# Altium PCB BAILEY.PcbDoc (part 2 of 8)
Units mil, origin at the board's own origin, x right, y up, seen from the top; angles counter-clockwise.
Board outline 4500 x 4000 mil, 4 copper layers (Signal Layer 1, Signal Layer 2, Signal Layer 3, Signal Layer 4), stack 59.904 mil thick; 190 components, 117 nets, 664 pads, 291 vias.
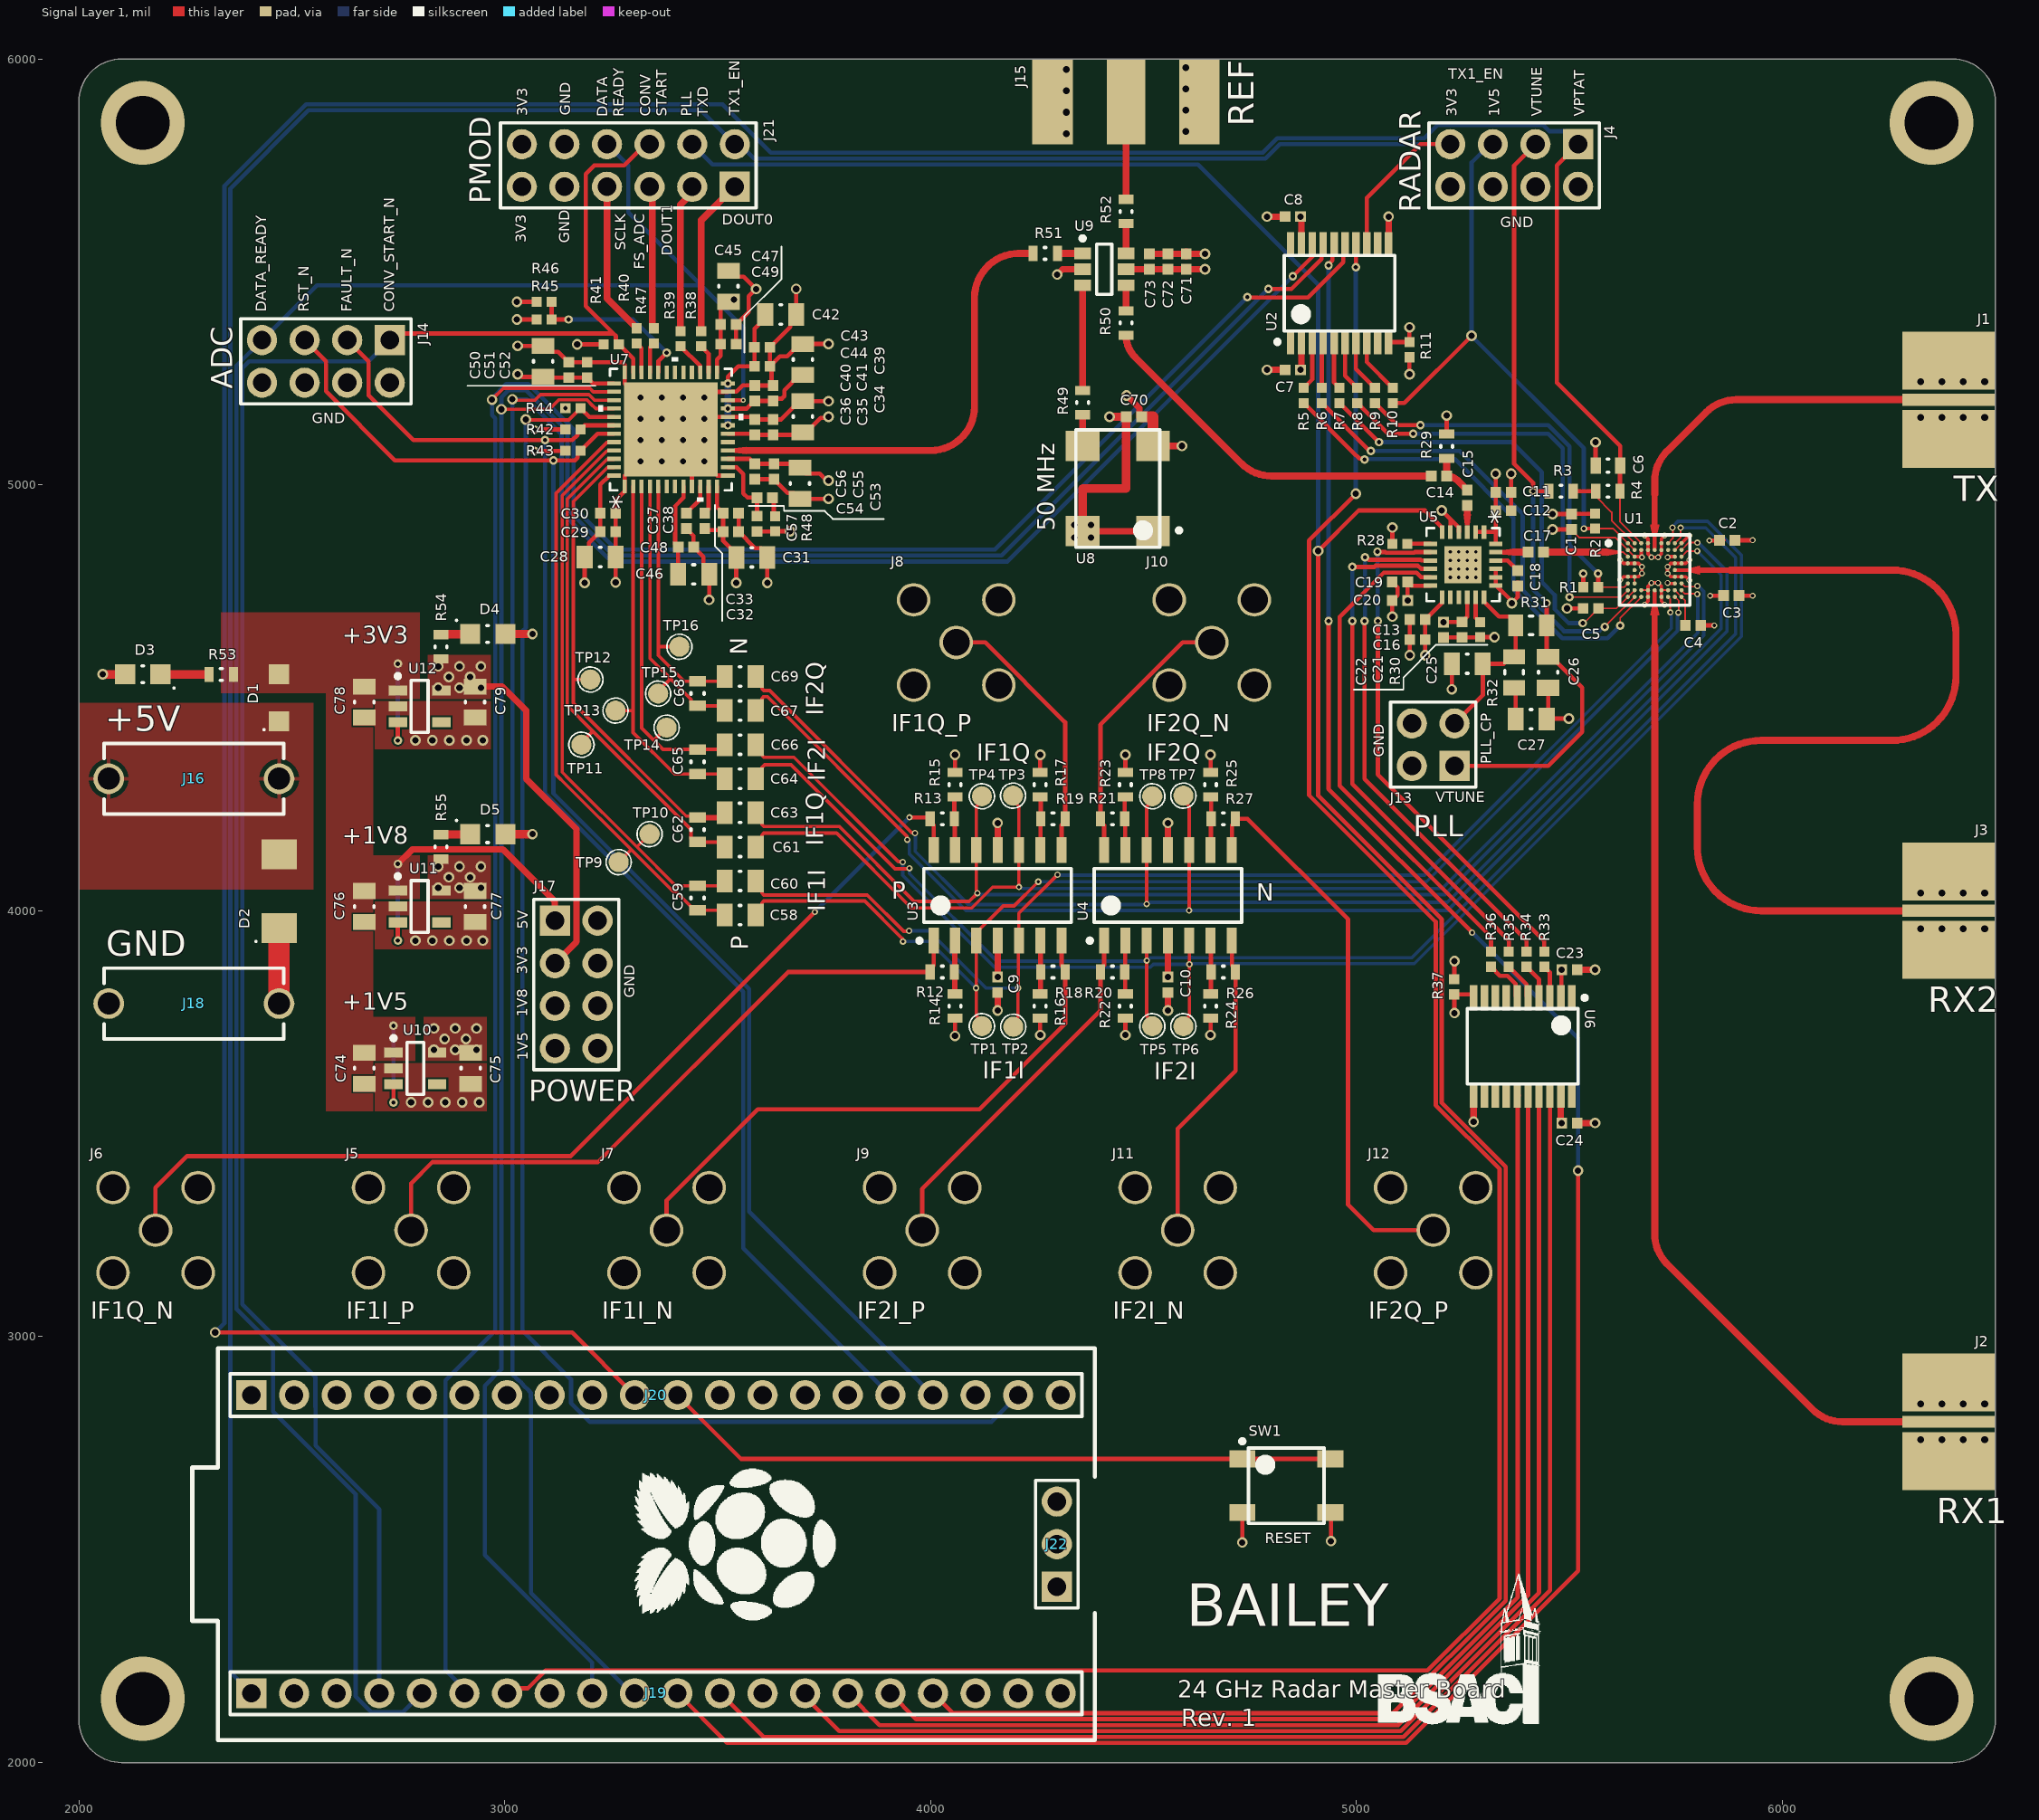
[diagram p0: Signal Layer 1 view]

## Part data (continued)
C17 C72: library part CAP, "Ceramic Capacitor, Ceramic, 50V, 10% +Tol, 10% -Tol, X7R, 15% TC, 0.01uF, Surface Mount, 0402", Case Code (Imperial)=0402, Case Code (Metric)=1005, Dielectric=Ceramic, Manufacturer=Yageo, Manufacturer Part Number=CC0402KPX7R9BB103, Max Operating Temperature=125°C, Min Operating Temperature=-55°C, Supplier Part Number=13-CC0402KPX7R9BB103CT-ND, Temperature Coefficient=30ppm/°C, Tolerance=10%, Voltage Rating="50 V", Voltage Rating (DC)=50V, Case/Package=0402, Category="Ceramic Capacitors", China RoHS=Compliant, ComponentLink1Description=https://datasheet.octopart.com:443/CC0402KPX7R9BB103-Yageo-datasheet-177165144.pdf?src-supplier=IHS, ComponentLink1URL=https://datasheet.octopart.com:443/CC0402KPX7R9BB103-Yageo-datasheet-177165144.pdf?src-supplier=IHS, ComponentLink2Description=https://datasheet.octopart.com:443/CC0402KPX7R9BB103-Yageo-datasheet-78855684.pdf?src-supplier=Upverter, ComponentLink2URL=https://datasheet.octopart.com:443/CC0402KPX7R9BB103-Yageo-datasheet-78855684.pdf?src-supplier=Upverter, ComponentLink3Description=https://datasheet.octopart.com/CC0402KPX7R9BB103-Yageo-datasheet-12526321.pdf, ComponentLink3URL=https://datasheet.octopart.com/CC0402KPX7R9BB103-Yageo-datasheet-12526321.pdf, ComponentLink4Description=https://datasheet.octopart.com/CC0402KPX7R9BB103-Yageo-datasheet-10883670.pdf, ComponentLink4URL=https://datasheet.octopart.com/CC0402KPX7R9BB103-Yageo-datasheet-10883670.pdf, ComponentLink5Description=https://datasheet.octopart.com:443/CC0402KPX7R9BB103-Yageo-datasheet-182965545.pdf?src-supplier=Farnell, ComponentLink5URL=https://datasheet.octopart.com:443/CC0402KPX7R9BB103-Yageo-datasheet-182965545.pdf?src-supplier=Farnell, ComponentLink6Description=https://datasheet.octopart.com:443/CC0402KPX7R9BB103-Yageo-datasheet-151948686.pdf?src-supplier=Farnell, ComponentLink6URL=https://datasheet.octopart.com:443/CC0402KPX7R9BB103-Yageo-datasheet-151948686.pdf?src-supplier=Farnell, ComponentLink7Description=https://datasheet.octopart.com:443/CC0402KPX7R9BB103-Yageo-datasheet-166511530.pdf?src-supplier=Future+Electronics, ComponentLink7URL=https://datasheet.octopart.com:443/CC0402KPX7R9BB103-Yageo-datasheet-166511530.pdf?src-supplier=Future+Electronics, ComponentLink8Description=https://datasheet.octopart.com:443/CC0402KPX7R9BB103-Yageo-datasheet-137700085.pdf?src-supplier=Future+Electronics, ComponentLink8URL=https://datasheet.octopart.com:443/CC0402KPX7R9BB103-Yageo-datasheet-137700085.pdf?src-supplier=Future+Electronics, ComponentLink9Description=https://datasheet.octopart.com:443/CC0402KPX7R9BB103-Yageo-datasheet-27626582.pdf?src-supplier=Future+Electronics, ComponentLink9URL=https://datasheet.octopart.com:443/CC0402KPX7R9BB103-Yageo-datasheet-27626582.pdf?src-supplier=Future+Electronics, ComponentLink10Description=https://datasheet.octopart.com:443/CC0402KPX7R9BB103-Yageo-datasheet-24578986.pdf?src-supplier=Future+Electronics, ComponentLink10URL=https://datasheet.octopart.com:443/CC0402KPX7R9BB103-Yageo-datasheet-24578986.pdf?src-supplier=Future+Electronics, ComponentLink11Description=https://datasheet.octopart.com:443/CC0402KPX7R9BB103-Yageo-datasheet-15895757.pdf?src-supplier=Future+Electronics, ComponentLink11URL=https://datasheet.octopart.com:443/CC0402KPX7R9BB103-Yageo-datasheet-15895757.pdf?src-supplier=Future+Electronics, ComponentLink12Description=http://sigma.octopart.com:80/rohs_statement/Surface-Mount-Ceramic-Multilayer-Capacitors%3B-General-Purpose-%26-High-Capacitance-Class-2%2C-X7R-Yageo-family-124.pdf?src-supplier=Compliance+Statements, ComponentLink12URL=http://sigma.octopart.com:80/rohs_statement/Surface-Mount-Ceramic-Multilayer-Capacitors%3B-General-Purpose-%26-High-Capacitance-Class-2%2C-X7R-Yageo-family-124.pdf?src-supplier=Compliance+Statements, ComponentLink13Description=http://sigma.octopart.com:80/reach_statement/Surface-Mount-Ceramic-Multilayer-Capacitors%3B-General-Purpose-%26-High-Capacitance-Class-2%2C-X7R-Yageo-family-125.pdf?src-supplier=Compliance+Statements, ComponentLink13URL=http://sigma.octopart.com:80/reach_statement/Surface-Mount-Ceramic-Multilayer-Capacitors%3B-General-Purpose-%26-High-Capacitance-Class-2%2C-X7R-Yageo-family-125.pdf?src-supplier=Compliance+Statements, ComponentLink14Description=http://sigma.octopart.com:80/conflict_mineral_statement/Yageo-company-3.pdf?src-supplier=Compliance+Statements, ComponentLink14URL=http://sigma.octopart.com:80/conflict_mineral_statement/Yageo-company-3.pdf?src-supplier=Compliance+Statements, ComponentLink15Description=http://sigma.octopart.com:80/rohs_statement/Yageo-company-2.pdf?src-supplier=Compliance+Statements, ComponentLink15URL=http://sigma.octopart.com:80/rohs_statement/Yageo-company-2.pdf?src-supplier=Compliance+Statements, Composition=Ceramic, Country of Origin="Mainland China, Taiwan", Depth=500µm, Dielectric Material=Ceramic, Export Control Classification Number (ECCN) Code=EAR99, Halogen Free="Halogen Free", Harmonized Tariff Schedule (HTS) Code=8532.24.00.20, Height=500µm, Introduction Date=2004-02-24, Lead Free="Lead Free", Length=1mm, Lifecycle Status=Production, Material=Ceramic, Mounting Technology="Surface Mount", Number of Terminals=2, Package Size=0402, Packaging="Tape and Reel", Pricing="1=0.1, 10=0.018, 50=0.012, 100=0.0101, 500=0.007, 1000=0.00606, 2500=0.00507, 5000=0.00448 (USD)", REACH SVHC=Yes, RoHS=Compliant, Stock=222524, Supplier=DigiKey, Termination=SMD/SMT, Weight=652.039032µg, Width=500µm
C18: library part CAP, "50V 100pF C0G ±5% 0402 Multilayer Ceramic Capacitors MLCC - SMD/SMT ROHS", Case Code (Imperial)=0402, Case Code (Metric)=1005, Dielectric=Ceramic, Manufacturer="Samsung Electro-Mechanics", Manufacturer Part Number=CL05C101JB5NNNC, Max Operating Temperature=125°C, Min Operating Temperature=-55°C, Supplier Part Number=1276-1025-1-ND, Temperature Coefficient=30ppm/°C, Tolerance=5%, Voltage=50V, Voltage Rating="50 V", Case/Package=0402, Category="Ceramic Capacitors", China RoHS=Compliant, ComponentLink1Description=https://datasheet.octopart.com:443/CL05C101JB5NNNC-Samsung-Electro-Mechanics-datasheet-136482243.pdf?src-supplier=Upverter, ComponentLink1URL=https://datasheet.octopart.com:443/CL05C101JB5NNNC-Samsung-Electro-Mechanics-datasheet-136482243.pdf?src-supplier=Upverter, ComponentLink2Description=https://datasheet.octopart.com/CL05C101JB5NNNC-Samsung-Electro-Mechanics-datasheet-8324245.pdf, ComponentLink2URL=https://datasheet.octopart.com/CL05C101JB5NNNC-Samsung-Electro-Mechanics-datasheet-8324245.pdf, ComponentLink3Description=https://datasheet.octopart.com/CL05C101JB5NNNC-Samsung-Electro-Mechanics-datasheet-97040617.pdf, ComponentLink3URL=https://datasheet.octopart.com/CL05C101JB5NNNC-Samsung-Electro-Mechanics-datasheet-97040617.pdf, ComponentLink4Description=https://datasheet.octopart.com/General-Multilayer-Ceramic-Capacitors-Samsung-datasheet-family-111.pdf, ComponentLink4URL=https://datasheet.octopart.com/General-Multilayer-Ceramic-Capacitors-Samsung-datasheet-family-111.pdf, ComponentLink5Description=https://datasheet.octopart.com:443/CL05C101JB5NNNC-Samsung-Electro-Mechanics-datasheet-141346959.pdf?src-supplier=Samsung+SCT, ComponentLink5URL=https://datasheet.octopart.com:443/CL05C101JB5NNNC-Samsung-Electro-Mechanics-datasheet-141346959.pdf?src-supplier=Samsung+SCT, ComponentLink6Description=https://datasheet.octopart.com:443/CL05C101JB5NNNC-Samsung-Electro-Mechanics-datasheet-110326792.pdf?src-supplier=Future+Electronics, ComponentLink6URL=https://datasheet.octopart.com:443/CL05C101JB5NNNC-Samsung-Electro-Mechanics-datasheet-110326792.pdf?src-supplier=Future+Electronics, ComponentLink7Description=https://datasheet.octopart.com:443/CL05C101JB5NNNC-Samsung-Electro-Mechanics-datasheet-81461704.pdf?src-supplier=Future+Electronics, ComponentLink7URL=https://datasheet.octopart.com:443/CL05C101JB5NNNC-Samsung-Electro-Mechanics-datasheet-81461704.pdf?src-supplier=Future+Electronics, ComponentLink8Description=https://datasheet.octopart.com:443/CL05C101JB5NNNC-Samsung-datasheet-26589069.pdf?src-supplier=Future+Electronics, ComponentLink8URL=https://datasheet.octopart.com:443/CL05C101JB5NNNC-Samsung-datasheet-26589069.pdf?src-supplier=Future+Electronics, ComponentLink9Description=https://datasheet.octopart.com:443/CL05C101JB5NNNC-Samsung-Electro-Mechanics-datasheet-149136758.pdf?src-supplier=Future+Electronics, ComponentLink9URL=https://datasheet.octopart.com:443/CL05C101JB5NNNC-Samsung-Electro-Mechanics-datasheet-149136758.pdf?src-supplier=Future+Electronics, ComponentLink10Description=https://datasheet.octopart.com:443/CL05C101JB5NNNC-Samsung-datasheet-37081328.pdf?src-supplier=Future+Electronics, ComponentLink10URL=https://datasheet.octopart.com:443/CL05C101JB5NNNC-Samsung-datasheet-37081328.pdf?src-supplier=Future+Electronics, ComponentLink11Description=https://datasheet.octopart.com:443/CL05C101JB5NNNC-Samsung-datasheet-8326407.pdf?src-supplier=TME, ComponentLink11URL=https://datasheet.octopart.com:443/CL05C101JB5NNNC-Samsung-datasheet-8326407.pdf?src-supplier=TME, ComponentLink12Description=http://sigma.octopart.com:80/rohs_certificate/General-Multilayer-Ceramic-Capacitors-Samsung-family-110.pdf?src-supplier=Compliance+Statements, ComponentLink12URL=http://sigma.octopart.com:80/rohs_certificate/General-Multilayer-Ceramic-Capacitors-Samsung-family-110.pdf?src-supplier=Compliance+Statements, ComponentLink13Description=http://sigma.octopart.com:80/rohs_statement/General-Multilayer-Ceramic-Capacitors-Samsung-family-132.pdf?src-supplier=Compliance+Statements, ComponentLink13URL=http://sigma.octopart.com:80/rohs_statement/General-Multilayer-Ceramic-Capacitors-Samsung-family-132.pdf?src-supplier=Compliance+Statements, ComponentLink14Description=http://sigma.octopart.com:80/reach_statement/General-Multilayer-Ceramic-Capacitors-Samsung-family-133.pdf?src-supplier=Compliance+Statements, ComponentLink14URL=http://sigma.octopart.com:80/reach_statement/General-Multilayer-Ceramic-Capacitors-Samsung-family-133.pdf?src-supplier=Compliance+Statements, Contact Plating=Tin, Country of Origin="Mainland China, Philippines, South Korea", Depth=500µm, Dielectric Material=Ceramic, Export Control Classification Number (ECCN) Code=EAR99, Harmonized Tariff Schedule (HTS) Code=8532.24.00.20, Height=550µm, Introduction Date=2007-11-14, Length=1mm, Lifecycle Status=Production, Material=Ceramic, Mounting Technology="Surface Mount", Number of Terminals=2, Package Size=0402, Pricing="1=0.08, 10=0.003 (USD)", Radiation Hardening=No, REACH SVHC=Yes, RoHS=Compliant, Schedule B="8532240020, 8532240020|8532240020, 8532240020|8532240020|8532240020, 8532240020|8532240020|8532240020|8532240020", Stock=2037674, Supplier=DigiKey, Thickness=558.8µm, Voltage Rating (DC)=50V, Width=500µm
C25: library part CAP, "0805 750 pF 50 V ±5% Tolerance C0G SMT Multilayer Ceramic Capacitor", Case Code (Imperial)=0805, Case Code (Metric)=2012, Dielectric=Ceramic, Manufacturer="Murata Electronics", Manufacturer Lifecycle Status=NRND, Manufacturer Part Number=GRM2165C1H751JA01D, Max Operating Temperature=125°C, Min Operating Temperature=-55°C, Supplier Part Number=490-1620-1-ND, Tolerance=5%, Voltage Rating="50 V", Voltage Rating (DC)=50V, Case/Package=0805, Category="Ceramic Capacitors", ComponentLink1Description=https://datasheet.octopart.com:443/GRM2165C1H751JA01D-Murata-datasheet-141276297.pdf?src-supplier=Future+Electronics, ComponentLink1URL=https://datasheet.octopart.com:443/GRM2165C1H751JA01D-Murata-datasheet-141276297.pdf?src-supplier=Future+Electronics, ComponentLink2Description=https://datasheet.octopart.com:443/GRM2165C1H751JA01D-Murata-datasheet-22122223.pdf?src-supplier=Future+Electronics, ComponentLink2URL=https://datasheet.octopart.com:443/GRM2165C1H751JA01D-Murata-datasheet-22122223.pdf?src-supplier=Future+Electronics, ComponentLink3Description=https://datasheet.octopart.com/GRM2165C1H751JA01D-Murata-datasheet-8819587.pdf, ComponentLink3URL=https://datasheet.octopart.com/GRM2165C1H751JA01D-Murata-datasheet-8819587.pdf, ComponentLink4Description=https://datasheet.octopart.com/GRM2165C1H751JA01D-Murata-datasheet-12515295.pdf, ComponentLink4URL=https://datasheet.octopart.com/GRM2165C1H751JA01D-Murata-datasheet-12515295.pdf, ComponentLink5Description=https://datasheet.octopart.com/GRM2165C1H751JA01D-Murata-datasheet-12510076.pdf, ComponentLink5URL=https://datasheet.octopart.com/GRM2165C1H751JA01D-Murata-datasheet-12510076.pdf, ComponentLink6Description=https://datasheet.octopart.com/GRM2165C1H751JA01D-Murata-datasheet-11978611.pdf, ComponentLink6URL=https://datasheet.octopart.com/GRM2165C1H751JA01D-Murata-datasheet-11978611.pdf, ComponentLink7Description=https://datasheet.octopart.com/GRM2165C1H751JA01D-Murata-datasheet-10025737.pdf, ComponentLink7URL=https://datasheet.octopart.com/GRM2165C1H751JA01D-Murata-datasheet-10025737.pdf, ComponentLink8Description=https://datasheet.octopart.com/GRM2165C1H751JA01D-Murata-datasheet-14401321.pdf, ComponentLink8URL=https://datasheet.octopart.com/GRM2165C1H751JA01D-Murata-datasheet-14401321.pdf, ComponentLink9Description=https://datasheet.octopart.com:443/GRM2165C1H751JA01D-Murata-datasheet-140706047.pdf?src-supplier=Ciiva, ComponentLink9URL=https://datasheet.octopart.com:443/GRM2165C1H751JA01D-Murata-datasheet-140706047.pdf?src-supplier=Ciiva, ComponentLink10Description=https://datasheet.octopart.com:443/GRM2165C1H751JA01D-Murata-datasheet-138743557.pdf?src-supplier=Ciiva, ComponentLink10URL=https://datasheet.octopart.com:443/GRM2165C1H751JA01D-Murata-datasheet-138743557.pdf?src-supplier=Ciiva, ComponentLink11Description=https://datasheet.octopart.com:443/GRM2165C1H751JA01D-Murata-datasheet-102.pdf?src-supplier=DigiKey, ComponentLink11URL=https://datasheet.octopart.com:443/GRM2165C1H751JA01D-Murata-datasheet-102.pdf?src-supplier=DigiKey, ComponentLink12Description=http://sigma.octopart.com:80/reach_statement/Murata-company-16.pdf?src-supplier=Compliance+Statements, ComponentLink12URL=http://sigma.octopart.com:80/reach_statement/Murata-company-16.pdf?src-supplier=Compliance+Statements, Depth=1.25mm, Dielectric Material=Ceramic, Export Control Classification Number (ECCN) Code=EAR99, Harmonized Tariff Schedule (HTS) Code=8532.24.00.20, Height=600µm, Introduction Date=2013-11-20, Lead Free="Lead Free", Length=2mm, Lifecycle Status=NRND, Material=Ceramic, Mounting Technology="Surface Mount", Number of Terminals=2, Package Size=0805, Pricing="1=0.19, 10=0.107, 50=0.0762, 100=0.0667, 500=0.05076, 1000=0.04585 (USD)", REACH SVHC=Yes, RoHS=Compliant, Schedule B="8532240020, 8532240020|8532240020|8532240020|8532240020|8532240020", Stock=12864, Supplier=DigiKey, Termination=SMD/SMT, Thickness=600µm, Width=1.25mm
C26: library part CAP, "Capacitor SMD Generic", Package Size=0805
C27: library part CAP, "Ceramic Capacitor, Multilayer, Ceramic, 100V, 5% +Tol, 5% -Tol, C0G, 0.015uF, Surface Mount, 2012M/0805", Case/Package=0805, Dielectric=Ceramic, Manufacturer="Murata Electronics", Manufacturer Lifecycle Status="IN PRODUCTION", Manufacturer Part Number=GRM2165C2A153JA01D, Max Operating Temperature=125°C, Min Operating Temperature=-55°C, Supplier Part Number=490-GRM2165C2A153JA01DCT-ND, Temperature Coefficient=30ppm/°C, Tolerance=5%, Voltage Rating="100 V", Voltage Rating (DC)=100V, Category="Ceramic Capacitors", ComponentLink1Description=https://datasheet.octopart.com:443/GRM2165C2A153JA01D-Murata-datasheet-141276372.pdf?src-supplier=Geoflip, ComponentLink1URL=https://datasheet.octopart.com:443/GRM2165C2A153JA01D-Murata-datasheet-141276372.pdf?src-supplier=Geoflip, ComponentLink2Description=https://datasheet.octopart.com:443/GRM2165C2A153JA01D-Murata-datasheet-165579666.pdf?src-supplier=TME, ComponentLink2URL=https://datasheet.octopart.com:443/GRM2165C2A153JA01D-Murata-datasheet-165579666.pdf?src-supplier=TME, ComponentLink3Description=https://datasheet.octopart.com:443/GRM2165C2A153JA01D-Murata-datasheet-140706081.pdf?src-supplier=Ciiva, ComponentLink3URL=https://datasheet.octopart.com:443/GRM2165C2A153JA01D-Murata-datasheet-140706081.pdf?src-supplier=Ciiva, ComponentLink4Description=https://datasheet.octopart.com:443/GRM2165C2A153JA01D-Murata-datasheet-138743583.pdf?src-supplier=Ciiva, ComponentLink4URL=https://datasheet.octopart.com:443/GRM2165C2A153JA01D-Murata-datasheet-138743583.pdf?src-supplier=Ciiva, ComponentLink5Description=https://datasheet.octopart.com/GRM2165C2A153JA01D-Murata-datasheet-12515295.pdf, ComponentLink5URL=https://datasheet.octopart.com/GRM2165C2A153JA01D-Murata-datasheet-12515295.pdf, ComponentLink6Description=https://datasheet.octopart.com/GRM2165C2A153JA01D-Murata-datasheet-12510076.pdf, ComponentLink6URL=https://datasheet.octopart.com/GRM2165C2A153JA01D-Murata-datasheet-12510076.pdf, ComponentLink7Description=https://datasheet.octopart.com/GRM2165C2A153JA01D-Murata-datasheet-11978611.pdf, ComponentLink7URL=https://datasheet.octopart.com/GRM2165C2A153JA01D-Murata-datasheet-11978611.pdf, ComponentLink8Description=https://datasheet.octopart.com/GRM2165C2A153JA01D-Murata-datasheet-10025737.pdf, ComponentLink8URL=https://datasheet.octopart.com/GRM2165C2A153JA01D-Murata-datasheet-10025737.pdf, ComponentLink9Description=https://datasheet.octopart.com/GRM2165C2A153JA01D-Murata-datasheet-8819587.pdf, ComponentLink9URL=https://datasheet.octopart.com/GRM2165C2A153JA01D-Murata-datasheet-8819587.pdf, ComponentLink10Description=http://sigma.octopart.com:80/reach_statement/Murata-company-16.pdf?src-supplier=Compliance+Statements, ComponentLink10URL=http://sigma.octopart.com:80/reach_statement/Murata-company-16.pdf?src-supplier=Compliance+Statements, Dielectric Material=Ceramic, Export Control Classification Number (ECCN) Code=EAR99, Harmonized Tariff Schedule (HTS) Code=8532.24.00.20, Height=600µm, Introduction Date=2020-01-27, Length=2mm, Lifecycle Status=Production, Material=Ceramic, Mounting Technology="Surface Mount", Number of Terminals=2, Package Size=0805, Pricing="1=0.15, 10=0.085, 50=0.06, 100=0.0523, 500=0.03932, 1000=0.03531 (USD)", REACH SVHC=Yes, RoHS=Compliant, Stock=4583, Supplier=DigiKey, Thickness=600µm, Width=1.25mm
C28 C31 C34 C39 C42 C45 C46 C50 C53 C58 C60 C61 C63 C64 C66 C67 C69: library part CAP, "16V 10uF X7R ±10% 0805 Multilayer Ceramic Capacitors MLCC - SMD/SMT ROHS", Case Code (Imperial)=0805, Case Code (Metric)=2012, Dielectric=Ceramic, Manufacturer="Samsung Electro-Mechanics", Manufacturer Part Number=CL21B106KOQNNNE, Max Operating Temperature=125°C, Min Operating Temperature=-55°C, Supplier Part Number=1276-2872-1-ND, Tolerance=10%, Voltage=16V, Voltage Rating="16 V", Case/Package=0805, Category="Ceramic Capacitors", China RoHS=Compliant, ComponentLink1Description=https://datasheet.octopart.com:443/CL21B106KOQNNNE-Samsung-Electro-Mechanics-datasheet-136482503.pdf?src-supplier=IHS, ComponentLink1URL=https://datasheet.octopart.com:443/CL21B106KOQNNNE-Samsung-Electro-Mechanics-datasheet-136482503.pdf?src-supplier=IHS, ComponentLink2Description=https://datasheet.octopart.com:443/CL21B106KOQNNNE-Samsung-Electro-Mechanics-datasheet-116891046.pdf?src-supplier=Future+Electronics, ComponentLink2URL=https://datasheet.octopart.com:443/CL21B106KOQNNNE-Samsung-Electro-Mechanics-datasheet-116891046.pdf?src-supplier=Future+Electronics, ComponentLink3Description=https://datasheet.octopart.com:443/CL21B106KOQNNNE-Samsung-Electro-Mechanics-datasheet-81462191.pdf?src-supplier=Future+Electronics, ComponentLink3URL=https://datasheet.octopart.com:443/CL21B106KOQNNNE-Samsung-Electro-Mechanics-datasheet-81462191.pdf?src-supplier=Future+Electronics, ComponentLink4Description=https://datasheet.octopart.com:443/CL21B106KOQNNNE-Samsung-datasheet-12530662.pdf?src-supplier=Future+Electronics, ComponentLink4URL=https://datasheet.octopart.com:443/CL21B106KOQNNNE-Samsung-datasheet-12530662.pdf?src-supplier=Future+Electronics, ComponentLink5Description=https://datasheet.octopart.com:443/CL21B106KOQNNNE-Samsung-datasheet-26669285.pdf?src-supplier=Future+Electronics, ComponentLink5URL=https://datasheet.octopart.com:443/CL21B106KOQNNNE-Samsung-datasheet-26669285.pdf?src-supplier=Future+Electronics, ComponentLink6Description=https://datasheet.octopart.com:443/CL21B106KOQNNNE-Samsung-Electro-Mechanics-datasheet-149045986.pdf?src-supplier=Future+Electronics, ComponentLink6URL=https://datasheet.octopart.com:443/CL21B106KOQNNNE-Samsung-Electro-Mechanics-datasheet-149045986.pdf?src-supplier=Future+Electronics, ComponentLink7Description=https://datasheet.octopart.com/CL21B106KOQNNNE-Samsung-Electro-Mechanics-datasheet-97040617.pdf, ComponentLink7URL=https://datasheet.octopart.com/CL21B106KOQNNNE-Samsung-Electro-Mechanics-datasheet-97040617.pdf, ComponentLink8Description=https://datasheet.octopart.com/CL21B106KOQNNNE-Samsung-Electro-Mechanics-datasheet-8324245.pdf, ComponentLink8URL=https://datasheet.octopart.com/CL21B106KOQNNNE-Samsung-Electro-Mechanics-datasheet-8324245.pdf, ComponentLink9Description=https://datasheet.octopart.com:443/CL21B106KOQNNNE-Samsung-Electro-Mechanics-datasheet-11806859.pdf?src-supplier=Arrow+Electronics, ComponentLink9URL=https://datasheet.octopart.com:443/CL21B106KOQNNNE-Samsung-Electro-Mechanics-datasheet-11806859.pdf?src-supplier=Arrow+Electronics, ComponentLink10Description=https://datasheet.octopart.com:443/CL21B106KOQNNNE-Samsung-datasheet-8326407.pdf?src-supplier=TME, ComponentLink10URL=https://datasheet.octopart.com:443/CL21B106KOQNNNE-Samsung-datasheet-8326407.pdf?src-supplier=TME, Contact Plating=Tin, Country of Origin="Mainland China, Philippines, South Korea", Depth=1.25mm, Dielectric Material=Ceramic, Export Control Classification Number (ECCN) Code=EAR99, Harmonized Tariff Schedule (HTS) Code=8532.24.00.20, Height=1.4mm, Introduction Date=2010-04-09, Length=2mm, Lifecycle Status=Production, Material=Ceramic, Mounting Technology="Surface Mount", Number of Terminals=2, Package Size=0805, Pricing="1=0.08, 10=0.035 (USD)", Radiation Hardening=No, REACH SVHC=Yes, RoHS=Compliant, Schedule B="8532240020, 8532240020|8532240020, 8532240020|8532240020|8532240020, 8532240020|8532240020|8532240020|8532240020", Stock=2300374, Supplier=DigiKey, Thickness=1.397mm, Voltage Rating (DC)=16V, Width=1.25mm
C37 C38: library part CAP, "0402 0.47 uF 6.3 V ±10% Tolerance X5R SMT Multilayer Ceramic Capacitor", Case Code (Imperial)=0402, Case Code (Metric)=1005, Dielectric=Ceramic, Insulation Resistance=10GΩ, Manufacturer="Murata Electronics", Manufacturer Lifecycle Status=NRND, Manufacturer Part Number=GRM155R60J474KE19D, Max Operating Temperature=85°C, Min Operating Temperature=-55°C, Supplier Part Number=490-3266-1-ND, Tolerance=10%, Voltage=6.3V, Voltage Rating="6.3 V", Case/Package=0402, Category="Ceramic Capacitors", ComponentLink1Description=https://datasheet.octopart.com/GRM155R60J474KE19D-Murata-datasheet-12515295.pdf, ComponentLink1URL=https://datasheet.octopart.com/GRM155R60J474KE19D-Murata-datasheet-12515295.pdf, ComponentLink2Description=https://datasheet.octopart.com/GRM155R60J474KE19D-Murata-datasheet-12510076.pdf, ComponentLink2URL=https://datasheet.octopart.com/GRM155R60J474KE19D-Murata-datasheet-12510076.pdf, ComponentLink3Description=https://datasheet.octopart.com/GRM155R60J474KE19D-Murata-datasheet-11978611.pdf, ComponentLink3URL=https://datasheet.octopart.com/GRM155R60J474KE19D-Murata-datasheet-11978611.pdf, ComponentLink4Description=https://datasheet.octopart.com/GRM155R60J474KE19D-Murata-datasheet-10025737.pdf, ComponentLink4URL=https://datasheet.octopart.com/GRM155R60J474KE19D-Murata-datasheet-10025737.pdf, ComponentLink5Description=https://datasheet.octopart.com/GRM155R60J474KE19D-Murata-datasheet-8819587.pdf, ComponentLink5URL=https://datasheet.octopart.com/GRM155R60J474KE19D-Murata-datasheet-8819587.pdf, ComponentLink6Description=https://datasheet.octopart.com:443/GRM155R60J474KE19D-Murata-datasheet-501912.pdf?src-supplier=Newark, ComponentLink6URL=https://datasheet.octopart.com:443/GRM155R60J474KE19D-Murata-datasheet-501912.pdf?src-supplier=Newark, ComponentLink7Description=https://datasheet.octopart.com:443/GRM155R60J474KE19D-Murata-datasheet-101584254.pdf?src-supplier=element14+APAC, ComponentLink7URL=https://datasheet.octopart.com:443/GRM155R60J474KE19D-Murata-datasheet-101584254.pdf?src-supplier=element14+APAC, ComponentLink8Description=https://datasheet.octopart.com:443/GRM155R60J474KE19D-Murata-datasheet-21400055.pdf?src-supplier=element14+APAC, ComponentLink8URL=https://datasheet.octopart.com:443/GRM155R60J474KE19D-Murata-datasheet-21400055.pdf?src-supplier=element14+APAC, ComponentLink9Description=https://datasheet.octopart.com:443/GRM155R60J474KE19D-Murata-datasheet-514334.pdf?src-supplier=element14, ComponentLink9URL=https://datasheet.octopart.com:443/GRM155R60J474KE19D-Murata-datasheet-514334.pdf?src-supplier=element14, ComponentLink10Description=https://datasheet.octopart.com:443/GRM155R60J474KE19D-Murata-datasheet-14396882.pdf?src-supplier=Future+Electronics, ComponentLink10URL=https://datasheet.octopart.com:443/GRM155R60J474KE19D-Murata-datasheet-14396882.pdf?src-supplier=Future+Electronics, ComponentLink11Description=https://datasheet.octopart.com:443/GRM155R60J474KE19D-Murata-datasheet-13758418.pdf?src-supplier=Future+Electronics, ComponentLink11URL=https://datasheet.octopart.com:443/GRM155R60J474KE19D-Murata-datasheet-13758418.pdf?src-supplier=Future+Electronics, ComponentLink12Description=https://datasheet.octopart.com:443/GRM155R60J474KE19D-Murata-datasheet-44106129.pdf?src-supplier=Future+Electronics, ComponentLink12URL=https://datasheet.octopart.com:443/GRM155R60J474KE19D-Murata-datasheet-44106129.pdf?src-supplier=Future+Electronics, ComponentLink13Description=https://datasheet.octopart.com:443/GRM155R60J474KE19D-Murata-datasheet-141266224.pdf?src-supplier=Ciiva, ComponentLink13URL=https://datasheet.octopart.com:443/GRM155R60J474KE19D-Murata-datasheet-141266224.pdf?src-supplier=Ciiva, ComponentLink14Description=https://datasheet.octopart.com:443/GRM155R60J474KE19D-Murata-datasheet-140689689.pdf?src-supplier=Ciiva, ComponentLink14URL=https://datasheet.octopart.com:443/GRM155R60J474KE19D-Murata-datasheet-140689689.pdf?src-supplier=Ciiva, ComponentLink15Description=https://datasheet.octopart.com:443/GRM155R60J474KE19D-Murata-datasheet-138740666.pdf?src-supplier=Ciiva, ComponentLink15URL=https://datasheet.octopart.com:443/GRM155R60J474KE19D-Murata-datasheet-138740666.pdf?src-supplier=Ciiva, ComponentLink16Description=https://datasheet.octopart.com:443/GRM155R60J474KE19D-Murata-datasheet-81455571.pdf?src-supplier=TME, ComponentLink16URL=https://datasheet.octopart.com:443/GRM155R60J474KE19D-Murata-datasheet-81455571.pdf?src-supplier=TME, ComponentLink17Description=https://datasheet.octopart.com:443/GRM155R60J474KE19D-Murata-datasheet-11801400.pdf?src-supplier=Arrow+Electronics, ComponentLink17URL=https://datasheet.octopart.com:443/GRM155R60J474KE19D-Murata-datasheet-11801400.pdf?src-supplier=Arrow+Electronics, ComponentLink18Description=https://datasheet.octopart.com:443/GRM155R60J474KE19D-Murata-datasheet-632409.pdf?src-supplier=Farnell, ComponentLink18URL=https://datasheet.octopart.com:443/GRM155R60J474KE19D-Murata-datasheet-632409.pdf?src-supplier=Farnell, ComponentLink19Description=https://datasheet.octopart.com:443/GRM155R60J474KE19D-Murata-datasheet-118811.pdf?src-supplier=DigiKey, ComponentLink19URL=https://datasheet.octopart.com:443/GRM155R60J474KE19D-Murata-datasheet-118811.pdf?src-supplier=DigiKey, ComponentLink20Description=http://sigma.octopart.com:80/reach_statement/Murata-company-16.pdf?src-supplier=Compliance+Statements, ComponentLink20URL=http://sigma.octopart.com:80/reach_statement/Murata-company-16.pdf?src-supplier=Compliance+Statements, Depth=500µm, Dielectric Material=Ceramic, Height=500µm, Lead Free="Lead Free", Length=1mm, Lifecycle Status=NRND, Mounting Technology="Surface Mount", Number of Terminals=2, Package Size=0402, Packaging="Cut Tape", Pins=2, Pricing="1=0.1, 10=0.056, 50=0.039, 100=0.0336, 500=0.02468, 1000=0.02195, 2500=0.01906, 5000=0.01733 (USD)", Radiation Hardening=No, REACH SVHC=Yes, RoHS=Compliant, Schedule B="8532240020, 8532240020|8532240020, 8532240020|8532240020|8532240020, 8532240020|8532240020|8532240020|8532240020", Stock=4006034, Supplier=DigiKey, Termination=SMD/SMT, Thickness=500µm, Voltage Rating (DC)=6.3V, Width=500µm
C54: library part CAP, "50V 5.6nF C0G ±5% 0402 Multilayer Ceramic Capacitors MLCC - SMD/SMT ROHS", Case/Package=0402, Dielectric=Ceramic, Manufacturer="Murata Electronics", Manufacturer Lifecycle Status="IN PRODUCTION", Manufacturer Part Number=GRM1555C1H562JE01D, Max Operating Temperature=125°C, Min Operating Temperature=-55°C, Supplier Part Number=490-GRM1555C1H562JE01DCT-ND, Temperature Coefficient=30ppm/°C, Tolerance=5%, Voltage Rating="50 V", Voltage Rating (DC)=50V, Category="Ceramic Capacitors", ComponentLink1Description=https://datasheet.octopart.com:443/GRM1555C1H562JE01D-Murata-datasheet-165579666.pdf?src-supplier=TME, ComponentLink1URL=https://datasheet.octopart.com:443/GRM1555C1H562JE01D-Murata-datasheet-165579666.pdf?src-supplier=TME, ComponentLink2Description=https://datasheet.octopart.com:443/GRM1555C1H562JE01D-Murata-datasheet-141266224.pdf?src-supplier=Ciiva, ComponentLink2URL=https://datasheet.octopart.com:443/GRM1555C1H562JE01D-Murata-datasheet-141266224.pdf?src-supplier=Ciiva, ComponentLink3Description=https://datasheet.octopart.com:443/GRM1555C1H562JE01D-Murata-datasheet-140682534.pdf?src-supplier=Ciiva, ComponentLink3URL=https://datasheet.octopart.com:443/GRM1555C1H562JE01D-Murata-datasheet-140682534.pdf?src-supplier=Ciiva, ComponentLink4Description=https://datasheet.octopart.com:443/GRM1555C1H562JE01D-Murata-datasheet-138739662.pdf?src-supplier=Ciiva, ComponentLink4URL=https://datasheet.octopart.com:443/GRM1555C1H562JE01D-Murata-datasheet-138739662.pdf?src-supplier=Ciiva, ComponentLink5Description=https://datasheet.octopart.com/GRM1555C1H562JE01D-Murata-datasheet-12515295.pdf, ComponentLink5URL=https://datasheet.octopart.com/GRM1555C1H562JE01D-Murata-datasheet-12515295.pdf, ComponentLink6Description=https://datasheet.octopart.com/GRM1555C1H562JE01D-Murata-datasheet-12510076.pdf, ComponentLink6URL=https://datasheet.octopart.com/GRM1555C1H562JE01D-Murata-datasheet-12510076.pdf, ComponentLink7Description=https://datasheet.octopart.com/GRM1555C1H562JE01D-Murata-datasheet-11978611.pdf, ComponentLink7URL=https://datasheet.octopart.com/GRM1555C1H562JE01D-Murata-datasheet-11978611.pdf, ComponentLink8Description=https://datasheet.octopart.com/GRM1555C1H562JE01D-Murata-datasheet-10025737.pdf, ComponentLink8URL=https://datasheet.octopart.com/GRM1555C1H562JE01D-Murata-datasheet-10025737.pdf, ComponentLink9Description=https://datasheet.octopart.com/GRM1555C1H562JE01D-Murata-datasheet-8819587.pdf, ComponentLink9URL=https://datasheet.octopart.com/GRM1555C1H562JE01D-Murata-datasheet-8819587.pdf, ComponentLink10Description=http://sigma.octopart.com:80/reach_statement/Murata-company-16.pdf?src-supplier=Compliance+Statements, ComponentLink10URL=http://sigma.octopart.com:80/reach_statement/Murata-company-16.pdf?src-supplier=Compliance+Statements, Dielectric Material=Ceramic, Export Control Classification Number (ECCN) Code=EAR99, Harmonized Tariff Schedule (HTS) Code=8532.24.00.20, Height=500µm, Introduction Date=2020-01-27, Length=1mm, Lifecycle Status=Production, Material=Ceramic, Mounting Technology="Surface Mount", Number of Terminals=2, Package Size=0402, Pricing="1=0.1, 10=0.052, 50=0.0356, 100=0.0307, 500=0.02244, 1000=0.01991, 2500=0.01725, 5000=0.01565 (USD)", REACH SVHC=Yes, RoHS=Compliant, Schedule B="8532240020, 8532240020|8532240020|8532240020|8532240020|8532240020", Stock=13616, Supplier=DigiKey, Thickness=500µm, Width=500µm
C57: library part CAP, "Capacitor, Ceramic, Multilayer, 50 V, C0G, 0.00039 Uf, Surface Mount, 0402", Case Code (Imperial)=0402, Case Code (Metric)=1005, Dielectric=Ceramic, Manufacturer="Murata Electronics", Manufacturer Lifecycle Status="IN PRODUCTION", Manufacturer Part Number=GRM1555C1H391JA01D, Max Operating Temperature=125°C, Min Operating Temperature=-55°C, Supplier Part Number=490-1296-1-ND, Temperature Coefficient=30ppm/°C, Tolerance=5%, Voltage=50V, Voltage Rating="50 V", Case/Package=0402, Category="Ceramic Capacitors", ComponentLink1Description=https://datasheet.octopart.com:443/GRM1555C1H391JA01D-Murata-datasheet-11756562.pdf?src-supplier=_legacy+Avnet, ComponentLink1URL=https://datasheet.octopart.com:443/GRM1555C1H391JA01D-Murata-datasheet-11756562.pdf?src-supplier=_legacy+Avnet, ComponentLink2Description=https://datasheet.octopart.com:443/GRM1555C1H391JA01D-Murata-datasheet-46741834.pdf?src-supplier=element14+APAC, ComponentLink2URL=https://datasheet.octopart.com:443/GRM1555C1H391JA01D-Murata-datasheet-46741834.pdf?src-supplier=element14+APAC, ComponentLink3Description=https://datasheet.octopart.com:443/GRM1555C1H391JA01D-Murata-datasheet-14396425.pdf?src-supplier=Future+Electronics, ComponentLink3URL=https://datasheet.octopart.com:443/GRM1555C1H391JA01D-Murata-datasheet-14396425.pdf?src-supplier=Future+Electronics, ComponentLink4Description=https://datasheet.octopart.com:443/GRM1555C1H391JA01D-Murata-datasheet-22122223.pdf?src-supplier=Future+Electronics, ComponentLink4URL=https://datasheet.octopart.com:443/GRM1555C1H391JA01D-Murata-datasheet-22122223.pdf?src-supplier=Future+Electronics, ComponentLink5Description=https://datasheet.octopart.com:443/GRM1555C1H391JA01D-Murata-datasheet-44105932.pdf?src-supplier=Future+Electronics, ComponentLink5URL=https://datasheet.octopart.com:443/GRM1555C1H391JA01D-Murata-datasheet-44105932.pdf?src-supplier=Future+Electronics, ComponentLink6Description=https://datasheet.octopart.com:443/GRM1555C1H391JA01D-Murata-datasheet-165579666.pdf?src-supplier=TME, ComponentLink6URL=https://datasheet.octopart.com:443/GRM1555C1H391JA01D-Murata-datasheet-165579666.pdf?src-supplier=TME, ComponentLink7Description=https://datasheet.octopart.com:443/GRM1555C1H391JA01D-Murata-datasheet-83054218.pdf?src-supplier=TME, ComponentLink7URL=https://datasheet.octopart.com:443/GRM1555C1H391JA01D-Murata-datasheet-83054218.pdf?src-supplier=TME, ComponentLink8Description=https://datasheet.octopart.com:443/GRM1555C1H391JA01D-Murata-datasheet-141266224.pdf?src-supplier=Ciiva, ComponentLink8URL=https://datasheet.octopart.com:443/GRM1555C1H391JA01D-Murata-datasheet-141266224.pdf?src-supplier=Ciiva, ComponentLink9Description=https://datasheet.octopart.com:443/GRM1555C1H391JA01D-Murata-datasheet-140682023.pdf?src-supplier=Ciiva, ComponentLink9URL=https://datasheet.octopart.com:443/GRM1555C1H391JA01D-Murata-datasheet-140682023.pdf?src-supplier=Ciiva, ComponentLink10Description=https://datasheet.octopart.com:443/GRM1555C1H391JA01D-Murata-datasheet-138739583.pdf?src-supplier=Ciiva, ComponentLink10URL=https://datasheet.octopart.com:443/GRM1555C1H391JA01D-Murata-datasheet-138739583.pdf?src-supplier=Ciiva, ComponentLink11Description=https://datasheet.octopart.com/GRM1555C1H391JA01D-Murata-datasheet-12515295.pdf, ComponentLink11URL=https://datasheet.octopart.com/GRM1555C1H391JA01D-Murata-datasheet-12515295.pdf, ComponentLink12Description=https://datasheet.octopart.com/GRM1555C1H391JA01D-Murata-datasheet-12510076.pdf, ComponentLink12URL=https://datasheet.octopart.com/GRM1555C1H391JA01D-Murata-datasheet-12510076.pdf, ComponentLink13Description=https://datasheet.octopart.com/GRM1555C1H391JA01D-Murata-datasheet-11978611.pdf, ComponentLink13URL=https://datasheet.octopart.com/GRM1555C1H391JA01D-Murata-datasheet-11978611.pdf, ComponentLink14Description=https://datasheet.octopart.com/GRM1555C1H391JA01D-Murata-datasheet-10025737.pdf, ComponentLink14URL=https://datasheet.octopart.com/GRM1555C1H391JA01D-Murata-datasheet-10025737.pdf, ComponentLink15Description=https://datasheet.octopart.com/GRM1555C1H391JA01D-Murata-datasheet-8819587.pdf, ComponentLink15URL=https://datasheet.octopart.com/GRM1555C1H391JA01D-Murata-datasheet-8819587.pdf, ComponentLink16Description=https://datasheet.octopart.com:443/GRM1555C1H391JA01D-Murata-datasheet-102.pdf?src-supplier=DigiKey, ComponentLink16URL=https://datasheet.octopart.com:443/GRM1555C1H391JA01D-Murata-datasheet-102.pdf?src-supplier=DigiKey, ComponentLink17Description=http://sigma.octopart.com:80/reach_statement/Murata-company-16.pdf?src-supplier=Compliance+Statements, ComponentLink17URL=http://sigma.octopart.com:80/reach_statement/Murata-company-16.pdf?src-supplier=Compliance+Statements, Depth=500µm, Dielectric Material=Ceramic, Export Control Classification Number (ECCN) Code=EAR99, Harmonized Tariff Schedule (HTS) Code=8532.24.00.20, Height=500µm, Introduction Date=2003-10-14, Lead Free="Lead Free", Length=1mm, Lifecycle Status=Production, Material=Ceramic, Mounting Technology="Surface Mount", Number of Terminals=2, Package Size=0402, Packaging="Cut Tape", Pricing="1=0.1, 10=0.033, 50=0.0224, 100=0.0191, 500=0.01364, 1000=0.01196, 2500=0.01021, 5000=0.00916 (USD)", Radiation Hardening=No, REACH SVHC=Yes, RoHS=Compliant, Schedule B="8532240020, 8532240020|8532240020, 8532240020|8532240020|8532240020, 8532240020|8532240020|8532240020|8532240020", Stock=144832, Supplier=DigiKey, Termination=SMD/SMT, Thickness=500µm, Voltage Rating (DC)=50V, Width=500µm
C59 C62 C65 C68: library part CAP, "Ceramic Capacitor, Multilayer, Ceramic, 50V, 5% +Tol, 5% -Tol, C0G, 0+-30ppm/Celcius TC, 200pF, Surface Mount, 0603...", Case Code (Imperial)=0603, Case Code (Metric)=1608, Dielectric=Ceramic, Manufacturer="Samsung Electro-Mechanics", Manufacturer Part Number=CL10C201JB8NNNC, Max Operating Temperature=125°C, Min Operating Temperature=-55°C, Supplier Part Number=1276-2222-1-ND, Temperature Coefficient=30ppm/°C, Tolerance=5%, Voltage Rating="50 V", Voltage Rating (DC)=50V, Case/Package=0603, Category="Ceramic Capacitors", China RoHS=Compliant, ComponentLink1Description=https://datasheet.octopart.com:443/CL10C201JB8NNNC-Samsung-Electro-Mechanics-datasheet-137472383.pdf?src-supplier=IHS, ComponentLink1URL=https://datasheet.octopart.com:443/CL10C201JB8NNNC-Samsung-Electro-Mechanics-datasheet-137472383.pdf?src-supplier=IHS, ComponentLink2Description=https://datasheet.octopart.com:443/CL10C201JB8NNNC-Samsung-Electro-Mechanics-datasheet-110226353.pdf?src-supplier=Future+Electronics, ComponentLink2URL=https://datasheet.octopart.com:443/CL10C201JB8NNNC-Samsung-Electro-Mechanics-datasheet-110226353.pdf?src-supplier=Future+Electronics, ComponentLink3Description=https://datasheet.octopart.com:443/CL10C201JB8NNNC-Samsung-Electro-Mechanics-datasheet-81462002.pdf?src-supplier=Future+Electronics, ComponentLink3URL=https://datasheet.octopart.com:443/CL10C201JB8NNNC-Samsung-Electro-Mechanics-datasheet-81462002.pdf?src-supplier=Future+Electronics, ComponentLink4Description=https://datasheet.octopart.com:443/CL10C201JB8NNNC-Samsung-datasheet-42280589.pdf?src-supplier=Future+Electronics, ComponentLink4URL=https://datasheet.octopart.com:443/CL10C201JB8NNNC-Samsung-datasheet-42280589.pdf?src-supplier=Future+Electronics, ComponentLink5Description=https://datasheet.octopart.com:443/CL10C201JB8NNNC-Samsung-datasheet-15238953.pdf?src-supplier=Future+Electronics, ComponentLink5URL=https://datasheet.octopart.com:443/CL10C201JB8NNNC-Samsung-datasheet-15238953.pdf?src-supplier=Future+Electronics, ComponentLink6Description=https://datasheet.octopart.com:443/CL10C201JB8NNNC-Samsung-datasheet-26669146.pdf?src-supplier=Future+Electronics, ComponentLink6URL=https://datasheet.octopart.com:443/CL10C201JB8NNNC-Samsung-datasheet-26669146.pdf?src-supplier=Future+Electronics, ComponentLink7Description=https://datasheet.octopart.com:443/CL10C201JB8NNNC-Samsung-Electro-Mechanics-datasheet-149136898.pdf?src-supplier=Future+Electronics, ComponentLink7URL=https://datasheet.octopart.com:443/CL10C201JB8NNNC-Samsung-Electro-Mechanics-datasheet-149136898.pdf?src-supplier=Future+Electronics, ComponentLink8Description=https://datasheet.octopart.com/CL10C201JB8NNNC-Samsung-Electro-Mechanics-datasheet-97040617.pdf, ComponentLink8URL=https://datasheet.octopart.com/CL10C201JB8NNNC-Samsung-Electro-Mechanics-datasheet-97040617.pdf, ComponentLink9Description=https://datasheet.octopart.com/CL10C201JB8NNNC-Samsung-Electro-Mechanics-datasheet-8324245.pdf, ComponentLink9URL=https://datasheet.octopart.com/CL10C201JB8NNNC-Samsung-Electro-Mechanics-datasheet-8324245.pdf, ComponentLink10Description=https://datasheet.octopart.com:443/CL10C201JB8NNNC-Samsung-Electro-Mechanics-datasheet-11541288.pdf?src-supplier=Arrow+Electronics, ComponentLink10URL=https://datasheet.octopart.com:443/CL10C201JB8NNNC-Samsung-Electro-Mechanics-datasheet-11541288.pdf?src-supplier=Arrow+Electronics, Country of Origin="Mainland China, Philippines, South Korea", Depth=800µm, Dielectric Material=Ceramic, Export Control Classification Number (ECCN) Code=EAR99, Harmonized Tariff Schedule (HTS) Code=8532.24.00.20, Height=900µm, Introduction Date=2010-07-30, Length=1.6mm, Lifecycle Status=Production, Material=Ceramic, Mounting Technology="Surface Mount", Number of Terminals=2, Package Size=0603, Pricing="1=0.1, 10=0.049, 50=0.0336, 100=0.0289, 500=0.02102, 1000=0.01863 (USD)", Radiation Hardening=No, REACH SVHC=Yes, RoHS=Compliant, Schedule B="8532240020, 8532240020|8532240020, 8532240020|8532240020|8532240020, 8532240020|8532240020|8532240020|8532240020", Stock=177973, Supplier=DigiKey, Thickness=889µm, Width=800µm
C73: library part CAP, "50V 10pF C0G ±5% 0402 Multilayer Ceramic Capacitors MLCC - SMD/SMT ROHS", Case Code (Imperial)=0402, Case Code (Metric)=1005, Dielectric=Ceramic, Manufacturer="Murata Electronics", Manufacturer Lifecycle Status=NRND, Manufacturer Part Number=GRM1555C1H100JA01D, Max Operating Temperature=125°C, Min Operating Temperature=-55°C, Supplier Part Number=490-5921-1-ND, Temperature Coefficient=30ppm/°C, Tolerance=5%, Voltage=50V, Case/Package=0402, Category="Ceramic Capacitors", ComponentLink1Description=https://datasheet.octopart.com:443/GRM1555C1H100JA01D-Murata-datasheet-12559435.pdf?src-supplier=element14+APAC, ComponentLink1URL=https://datasheet.octopart.com:443/GRM1555C1H100JA01D-Murata-datasheet-12559435.pdf?src-supplier=element14+APAC, ComponentLink2Description=https://datasheet.octopart.com:443/GRM1555C1H100JA01D-Murata-datasheet-62317042.pdf?src-supplier=element14+APAC, ComponentLink2URL=https://datasheet.octopart.com:443/GRM1555C1H100JA01D-Murata-datasheet-62317042.pdf?src-supplier=element14+APAC, ComponentLink3Description=https://datasheet.octopart.com:443/GRM1555C1H100JA01D-Murata-datasheet-501912.pdf?src-supplier=element14+APAC, ComponentLink3URL=https://datasheet.octopart.com:443/GRM1555C1H100JA01D-Murata-datasheet-501912.pdf?src-supplier=element14+APAC, ComponentLink4Description=https://datasheet.octopart.com:443/GRM1555C1H100JA01D-Murata-datasheet-11857477.pdf?src-supplier=_legacy+Avnet, ComponentLink4URL=https://datasheet.octopart.com:443/GRM1555C1H100JA01D-Murata-datasheet-11857477.pdf?src-supplier=_legacy+Avnet, ComponentLink5Description=https://datasheet.octopart.com:443/GRM1555C1H100JA01D-Murata-datasheet-14396362.pdf?src-supplier=Future+Electronics, ComponentLink5URL=https://datasheet.octopart.com:443/GRM1555C1H100JA01D-Murata-datasheet-14396362.pdf?src-supplier=Future+Electronics, ComponentLink6Description=https://datasheet.octopart.com:443/GRM1555C1H100JA01D-Murata-datasheet-22122223.pdf?src-supplier=Future+Electronics, ComponentLink6URL=https://datasheet.octopart.com:443/GRM1555C1H100JA01D-Murata-datasheet-22122223.pdf?src-supplier=Future+Electronics, ComponentLink7Description=https://datasheet.octopart.com:443/GRM1555C1H100JA01D-Murata-datasheet-44105796.pdf?src-supplier=Future+Electronics, ComponentLink7URL=https://datasheet.octopart.com:443/GRM1555C1H100JA01D-Murata-datasheet-44105796.pdf?src-supplier=Future+Electronics, ComponentLink8Description=https://datasheet.octopart.com:443/GRM1555C1H100JA01D-Murata-datasheet-165579666.pdf?src-supplier=TME, ComponentLink8URL=https://datasheet.octopart.com:443/GRM1555C1H100JA01D-Murata-datasheet-165579666.pdf?src-supplier=TME, ComponentLink9Description=https://datasheet.octopart.com:443/GRM1555C1H100JA01D-Murata-datasheet-59876780.pdf?src-supplier=TME, ComponentLink9URL=https://datasheet.octopart.com:443/GRM1555C1H100JA01D-Murata-datasheet-59876780.pdf?src-supplier=TME, ComponentLink10Description=https://datasheet.octopart.com:443/GRM1555C1H100JA01D-Murata-datasheet-141266224.pdf?src-supplier=Ciiva, ComponentLink10URL=https://datasheet.octopart.com:443/GRM1555C1H100JA01D-Murata-datasheet-141266224.pdf?src-supplier=Ciiva, ComponentLink11Description=https://datasheet.octopart.com:443/GRM1555C1H100JA01D-Murata-datasheet-140680755.pdf?src-supplier=Ciiva, ComponentLink11URL=https://datasheet.octopart.com:443/GRM1555C1H100JA01D-Murata-datasheet-140680755.pdf?src-supplier=Ciiva, ComponentLink12Description=https://datasheet.octopart.com:443/GRM1555C1H100JA01D-Murata-datasheet-138739439.pdf?src-supplier=Ciiva, ComponentLink12URL=https://datasheet.octopart.com:443/GRM1555C1H100JA01D-Murata-datasheet-138739439.pdf?src-supplier=Ciiva, ComponentLink13Description=https://datasheet.octopart.com/GRM1555C1H100JA01D-Murata-datasheet-12515295.pdf, ComponentLink13URL=https://datasheet.octopart.com/GRM1555C1H100JA01D-Murata-datasheet-12515295.pdf, ComponentLink14Description=https://datasheet.octopart.com/GRM1555C1H100JA01D-Murata-datasheet-12510076.pdf, ComponentLink14URL=https://datasheet.octopart.com/GRM1555C1H100JA01D-Murata-datasheet-12510076.pdf, ComponentLink15Description=https://datasheet.octopart.com/GRM1555C1H100JA01D-Murata-datasheet-11978611.pdf, ComponentLink15URL=https://datasheet.octopart.com/GRM1555C1H100JA01D-Murata-datasheet-11978611.pdf, ComponentLink16Description=https://datasheet.octopart.com/GRM1555C1H100JA01D-Murata-datasheet-10025737.pdf, ComponentLink16URL=https://datasheet.octopart.com/GRM1555C1H100JA01D-Murata-datasheet-10025737.pdf, ComponentLink17Description=https://datasheet.octopart.com/GRM1555C1H100JA01D-Murata-datasheet-8819587.pdf, ComponentLink17URL=https://datasheet.octopart.com/GRM1555C1H100JA01D-Murata-datasheet-8819587.pdf, ComponentLink18Description=http://sigma.octopart.com:80/reach_statement/Murata-company-16.pdf?src-supplier=Compliance+Statements, ComponentLink18URL=http://sigma.octopart.com:80/reach_statement/Murata-company-16.pdf?src-supplier=Compliance+Statements, Country of Origin=Singapore, Depth=500µm, Dielectric Material=Ceramic, Export Control Classification Number (ECCN) Code=EAR99, Harmonized Tariff Schedule (HTS) Code=8532.24.00.20, Height=500µm, Introduction Date=2003-10-14, Lead Free="Lead Free", Length=1mm, Lifecycle Status=NRND, Material=Ceramic, Mounting Technology="Surface Mount", Number of Terminals=2, Package Size=0402, Packaging="Cut Tape", Pins=2, Pricing="1=0.1, 10=0.022, 50=0.0144, 100=0.0122, 500=0.0085, 1000=0.00738, 2500=0.0062, 5000=0.0055, 10000=0.00503, 20000=0.00454, 30000=0.0043, 50000=0.00404, 70000=0.00388, 100000=0.00373, 120000=0.00366, 240000=0.00342, 250000=0.00341 (USD)", Radiation Hardening=No, REACH SVHC=Yes, RoHS=Compliant, Schedule B="8532240020, 8532240020|8532240020, 8532240020|8532240020|8532240020, 8532240020|8532240020|8532240020|8532240020", Stock=712856, Supplier=DigiKey, Termination=SMD/SMT, Thickness=500µm, Voltage Rating=5%, Voltage Rating (DC)=50V, Width=500µm